# EAGLE board master_jorge3newIMU (EAGLE 7.1.0)
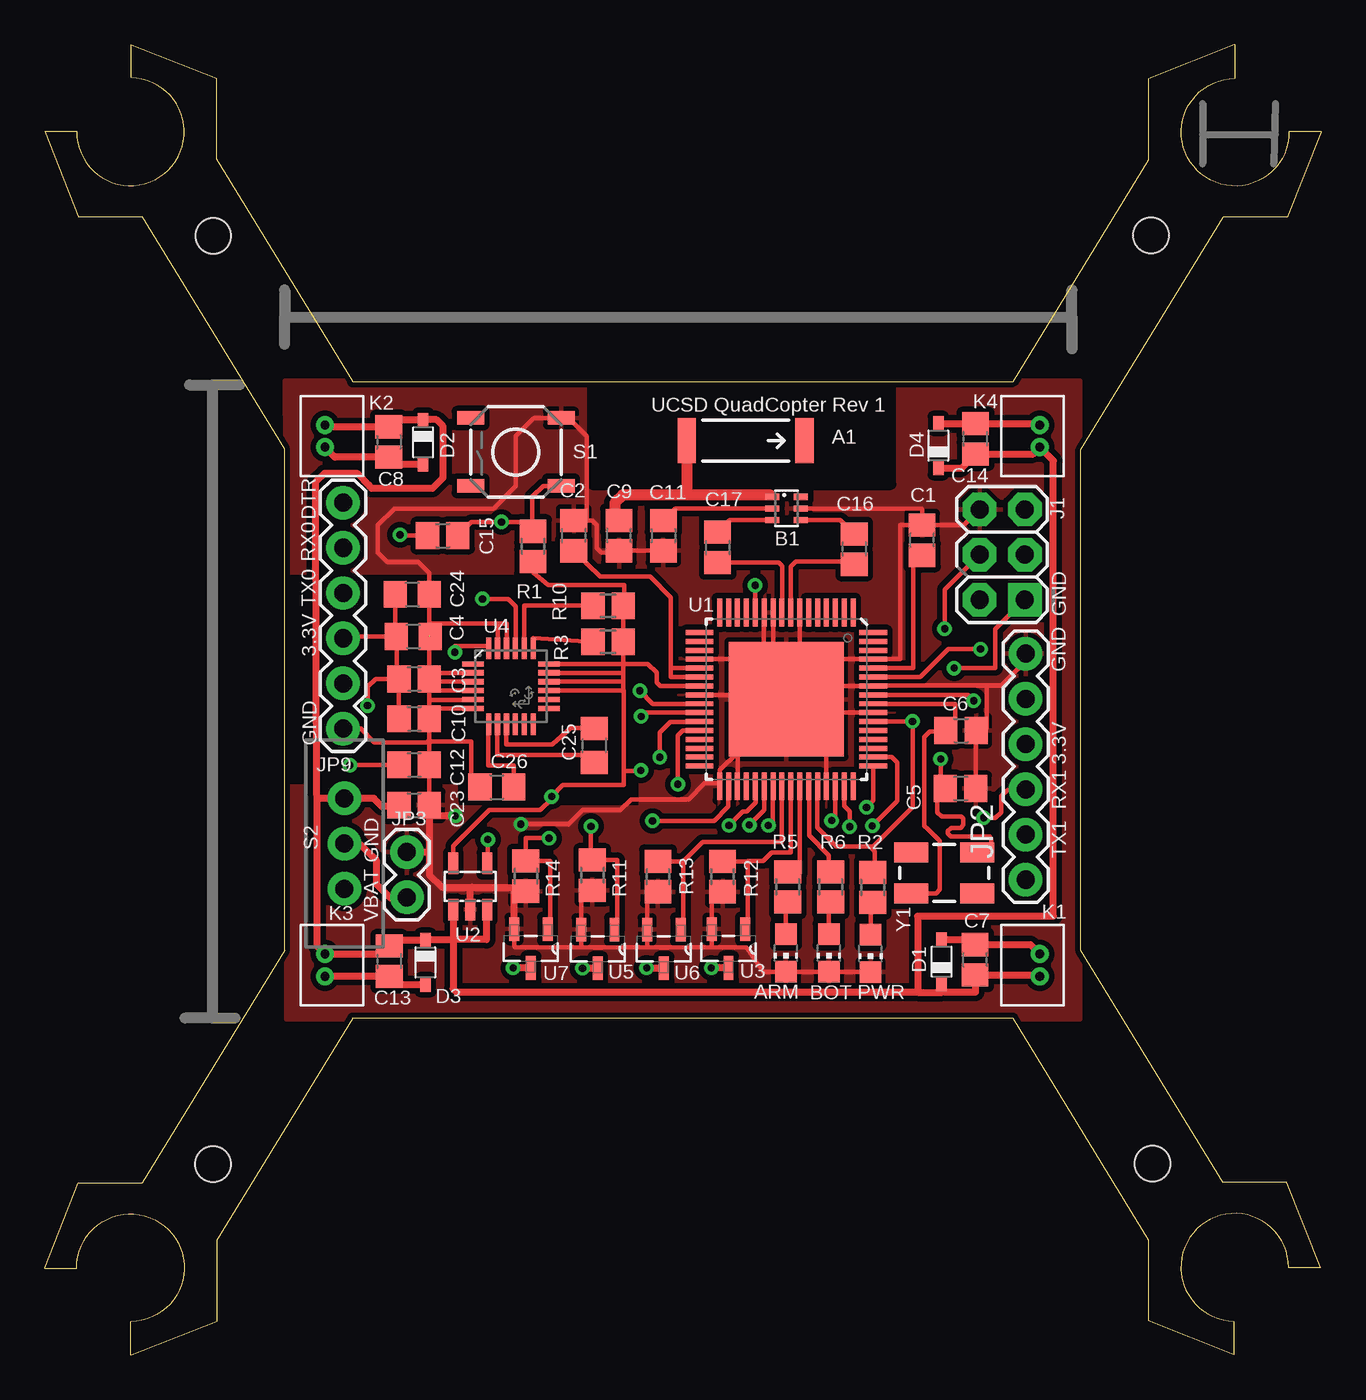
[diagram p0: board, top side]
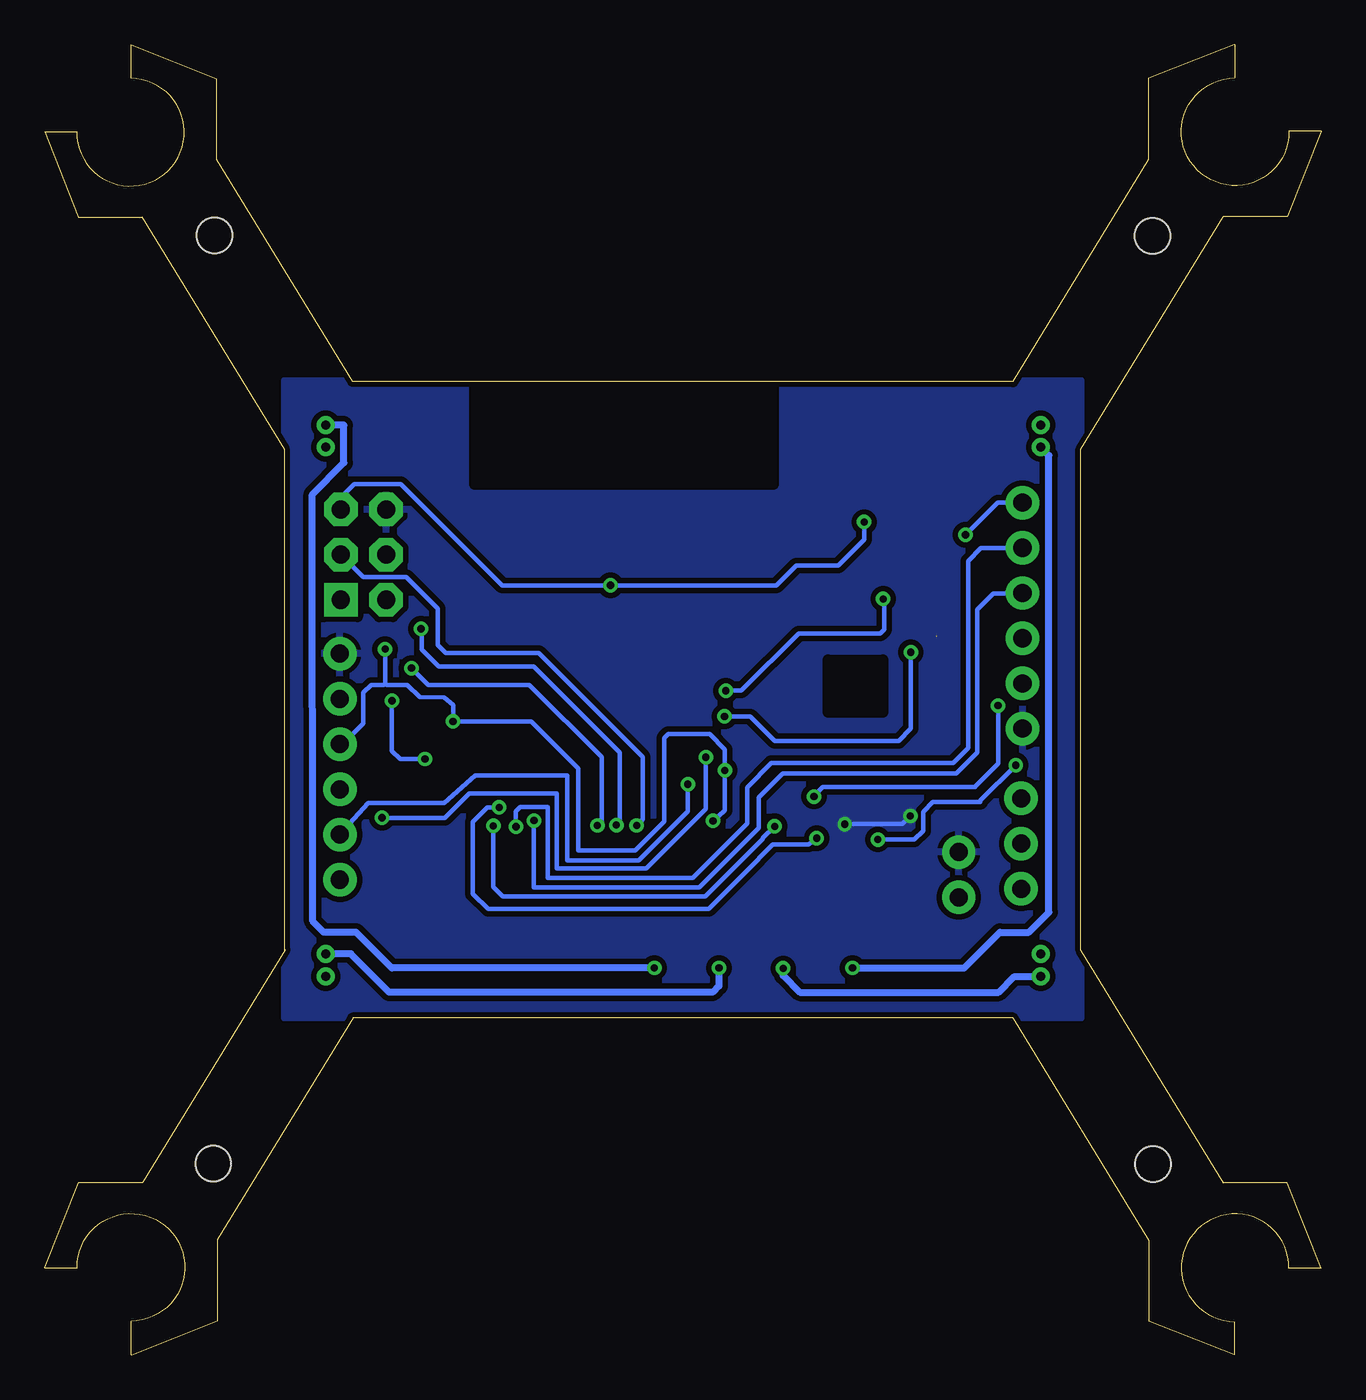
[diagram p1: board, bottom side, seen from below]

Size 71.68 x 73.61 mm. Coordinates in mm from the lower left corner, seen from the top.
Outline: 54.38,18.92 17.3,18.92 17.3,18.9 9.68,6.45 9.68,1.9 4.88,0 4.85,0 4.85,1.88 arc270 1.8,4.9 1.8,4.88 0,4.88 1.91,9.68 5.49,9.68 13.49,22.73 13.49,50.88 5.49,63.93 1.91,63.93 0,68.73 1.8,68.73 1.8,68.71 arc270 4.85,71.73 4.85,73.61 4.88,73.61 9.68,71.7 9.68,67.16 17.3,54.71 17.3,54.66
Outline: 58.19,22.73 58.19,50.85 66.19,63.91 69.77,63.91 71.68,68.71 69.88,68.71 69.88,68.68 arc-270 66.83,71.7 66.83,73.58 66.8,73.58 62,71.68 62,67.13 54.38,54.69
Outline: 17.3,54.68 54.38,54.68
Outline: 54.36,18.92 61.98,6.48 61.98,1.93 66.78,0.02 66.8,0.02 66.8,1.9 arc-270 69.85,4.93 69.85,4.9 71.65,4.9 69.75,9.7 66.17,9.7 58.17,22.76
Copper layers (1*16): Top 0.035559375mm / dielectric 1.501140625mm / Bottom 0.035559375mm
Design rules "4pcb-33board *": minimum track width 8mil, minimum drill 15mil, track to track 6mil, track to pad 6mil, pad to pad 6mil, via to via 6mil, smd to smd 6mil, copper to edge 10mil, drill to drill 10mil, minimum pad ring 10mil, minimum via ring 8mil, stop-mask expansion 4mil, vias tented up to drill 0mil, thermal gap 10mil
Net classes: 1 RFSIG: width 0.457 mm, clearance 0.205 mm to class 0, clearance 0.205 mm
Holes 2 mm at 9.45,10.72 62.2,10.74 9.47,62.86 62.13,62.89
tRestrict: area 30.8,48.9 to 35.3,54.5; area 36.9,48.9 to 41.9,54.5; area 43.2,48.9 to 47.5,54.5; area 35.3,53 to 36.9,54.5; area 41.9,53 to 43.2,54.5; area 41.9,48.9 to 43.2,49.9
bRestrict: area 35.3,48.9 to 36.9,53; area 30.8,48.9 to 35.3,54.5; area 35.3,53 to 36.9,54.5; area 36.9,48.9 to 41.9,54.5; area 41.9,53 to 43.2,54.5; area 43.2,48.9 to 47.5,54.5; area 41.9,48.9 to 43.2,49.9; area 24.6,36.1 to 27.7,39

## Footprints (pad centres in the part's own frame; a part is rotated, then mirrored left to right if it is on the bottom)
ANTENNA-CHIP5 = smd 1.016 x 2.54: FEED -3.302,0; NC 3.302,0
CHIP-LED0805 = smd 1.2 x 1.2: A 0,-1.05; C 0,1.05
BALUN = smd 0.35 x 0.8: 1 -0.65,-0.8; 2 0,-0.8; 3 0.65,-0.8; 4 0.65,0.8; 5 0,0.8; 6 -0.65,0.8
C0805 = smd 1.3 x 1.5: 1 -0.85,0; 2 0.85,0
C0805' = smd 1.3 x 1.5: 1 -0.95,0; 2 0.95,0
SOD323_ST = smd 0.8 x 0.6: A 1.25,0; C -1.25,0
2X3-NS = drill 1.016 pad 1.88 square: 1 -2.54,-1.27 | drill 1.016 pad 1.88 octagon: 2 -2.54,1.27; 3 0,-1.27; 4 0,1.27; 5 2.54,-1.27; 6 2.54,1.27
FTDI_BASIC = drill 1.016 pad 1.88: CTS 10.16,0; DTR 0,0; GND 12.7,0; RXI 2.54,0; TXO 5.08,0; VCC 7.62,0
1X02 = drill 1.016 pad 1.88: 1 0,0; 2 2.54,0
653002114822 = drill 0.5: 1 0.625,0; 2 -0.625,0
R0805 = smd 1.3 x 1.5: 1 -0.85,0; 2 0.85,0
TACTILE_SWITCH_SMD = smd 1.524 x 0.762: 1 -2.54,1.905; 2 2.54,1.905; 3 -2.54,-1.905; 4 2.54,-1.905
SWITCH-SPDT = drill 1.016 pad 1.88: 1 0,2.54; 2 0,0; 3 0,-2.54
QFN-64 = smd 1.562 x 0.28: 1 -4.881,3.75; 2 -4.881,3.25; 3 -4.881,2.75; 4 -4.881,2.25; 5 -4.881,1.75; 6 -4.881,1.25; 7 -4.881,0.75; 8 -4.881,0.25; 9 -4.881,-0.25; 10 -4.881,-0.75; 11 -4.881,-1.25; 12 -4.881,-1.75; 13 -4.881,-2.25; 14 -4.881,-2.75; 15 -4.881,-3.25; 16 -4.881,-3.75; 33 4.881,-3.75; 34 4.881,-3.25; 35 4.881,-2.75; 36 4.881,-2.25; 37 4.881,-1.75; 38 4.881,-1.25; 39 4.881,-0.75; 40 4.881,-0.25; 41 4.881,0.25; 42 4.881,0.75; 43 4.881,1.25; 44 4.881,1.75; 45 4.881,2.25; 46 4.881,2.75; 47 4.881,3.25; 48 4.881,3.75 | smd 0.28 x 1.562: 17 -3.75,-4.881; 18 -3.25,-4.881; 19 -2.75,-4.881; 20 -2.25,-4.881; 21 -1.75,-4.881; 22 -1.25,-4.881; 23 -0.75,-4.881; 24 -0.25,-4.881; 25 0.25,-4.881; 26 0.75,-4.881; 27 1.25,-4.881; 28 1.75,-4.881; 29 2.25,-4.881; 30 2.75,-4.881; 31 3.25,-4.881; 32 3.75,-4.881; 49 3.75,4.881; 50 3.25,4.881; 51 2.75,4.881; 52 2.25,4.881; 53 1.75,4.881; 54 1.25,4.881; 55 0.75,4.881; 56 0.25,4.881; 57 -0.25,4.881; 58 -0.75,4.881; 59 -1.25,4.881; 60 -1.75,4.881; 61 -2.25,4.881; 62 -2.75,4.881; 63 -3.25,4.881; 64 -3.75,4.881 | smd 6.452 x 6.452: 65 0,0
SOT23-DBV = smd 0.55 x 1.2: 1 -0.95,-1.3; 2 0,-1.3; 3 0.95,-1.3; 4 0.95,1.3; 5 -0.95,1.3
SOT95P237X112-3N = smd 1.321 x 0.559: 1 -1.092,0.94; 2 -1.092,-0.94; 3 1.092,0
LGA-24 = smd 1.208 x 0.29: 1 -2.129,1.25; 2 -2.129,0.75; 3 -2.129,0.25; 4 -2.129,-0.25; 5 -2.129,-0.75; 6 -2.129,-1.25; 13 2.129,-1.25; 14 2.129,-0.75; 15 2.129,-0.25; 16 2.129,0.25; 17 2.129,0.75; 18 2.129,1.25 | smd 0.29 x 1.208: 7 -1.25,-2.129; 8 -0.75,-2.129; 9 -0.25,-2.129; 10 0.25,-2.129; 11 0.75,-2.129; 12 1.25,-2.129; 19 1.25,2.129; 20 0.75,2.129; 21 0.25,2.129; 22 -0.25,2.129; 23 -0.75,2.129; 24 -1.25,2.129
CRYSTAL-SMD-5X3 = smd 1.9 x 1.1: 1 -1.85,-1.15; 2 1.85,-1.15; 3 1.85,1.15; 4 -1.85,1.15

## Placement (x,y rotation side)
A1  ANTENNA2SMD5  [ANTENNA-CHIP5]  39.37,51.36 0 top
ARM  GREEN  [CHIP-LED0805]  41.63,22.58 180 top
B1  748421245  [BALUN]  41.66,47.55 270 top
BOT  GREEN  [CHIP-LED0805]  44.04,22.58 180 top
C1  1uF  [C0805]  49.28,45.77 90 top
C2  1uF  [C0805]  29.72,46.02 90 top
C3  1uF  [C0805]  20.75,37.97 0 top
C4  100nF  [C0805']  20.7,40.36 0 top
C5  12pF  [C0805]  51.44,31.83 0 top
C6  12pF  [C0805]  51.46,35.08 0 top
C7  1uF  [C0805]  52.25,22.2 90 top
C8  1uF  [C0805]  19.33,51.28 270 top
C9  0.75pF  [C0805]  32.26,46.02 90 top
C10  1uF  [C0805]  20.75,35.74 0 top
C11  22pF  [C0805]  34.75,46.02 270 top
C12  10nF  [C0805]  20.75,33.15 0 top
C13  1uF  [C0805]  19.35,22.12 270 top
C14  1uF  [C0805]  52.27,51.46 90 top
C15  0.1uF  [C0805]  22.35,46.02 0 top
C16  JUMP  [C0805]  45.47,45.26 90 top
C17  JUMP  [C0805]  37.8,45.36 270 top
C23  1uF  [C0805]  20.75,30.89 0 top
C24  10uF  [C0805']  20.65,42.72 0 top
C25  0.22uF  [C0805']  30.86,34.24 270 top
C26  4.7uF  [C0805']  25.4,31.9 0 top
D1  BAS16WS  [SOD323_ST]  50.37,22.1 90 top
D2  BAS16WS  [SOD323_ST]  21.26,51.26 270 top
D3  BAS16WS  [SOD323_ST]  21.39,22.05 270 top
D4  BAS16WS  [SOD323_ST]  50.19,51.08 90 top
J1  ISP  [2X3-NS]  53.77,44.96 90 top
JP2  FTDI  [FTDI_BASIC]  55.09,26.7 90 top
JP3  Battery  [1X02]  20.35,28.24 270 top
JP9  FTDI  [FTDI_BASIC]  16.76,47.88 270 top
K1  653002114822  [653002114822]  55.88,21.89 270 top
K2  653002114822  [653002114822]  15.75,51.61 90 top
K3  653002114822  [653002114822]  15.75,21.89 90 top
K4  653002114822  [653002114822]  55.88,51.61 270 top
PWR  RED  [CHIP-LED0805]  46.38,22.56 180 top
R1  10k  [R0805]  27.43,45.42 270 top
R2  330  [R0805]  46.51,26.26 90 top
R3  10k  [R0805]  31.65,40.06 0 top
R5  330  [R0805]  41.73,26.29 90 top
R6  330  [R0805]  44.15,26.29 90 top
R10  10k  [R0805]  31.65,42.09 0 top
R11  10K  [R0805]  30.76,26.95 270 top
R12  10K  [R0805]  38.07,26.87 270 top
R13  10K  [R0805]  34.44,26.87 270 top
R14  10K  [R0805]  27.03,26.9 270 top
S1  [TACTILE_SWITCH_SMD]  26.47,50.72 180 top
S2  SW  [SWITCH-SPDT]  16.84,28.73 180 top
U1  ATMEGA128RFA1  [QFN-64]  41.66,36.83 270 top
U2  TPS73633-DBVT  [SOT23-DBV]  23.9,26.31 0 top
U3  SI2302CDS-T1-E3  [SOT95P237X112-3N]  38.4,22.83 270 top
U4  LSM9DS0  [LGA-24]  26.19,37.57 0 top
U5  SI2302CDS-T1-E3  [SOT95P237X112-3N]  31.06,22.81 270 top
U6  SI2302CDS-T1-E3  [SOT95P237X112-3N]  34.77,22.81 270 top
U7  SI2302CDS-T1-E3  [SOT95P237X112-3N]  27.3,22.83 270 top
Y1  16MHz  [CRYSTAL-SMD-5X3]  50.52,27.08 0 top

## Library data of the parts
A1 B1 = SparkFun-RF
ARM BOT PWR = led
C1-C3 C5-C17 C23 R1-R3 R5 R6 R10-R14 = resistor
C4 C24-C26 = rcl
D1-D4 J1 U1 U4 = Controller
JP2 JP9 = SparkFun-Connectors
JP3 = SparkFun
K1-K4 = Wuerth_Elektronik_eiCan_Wire_to_Board_Connectors; OC_FARNELL: unknown
S1 = SparkFun-Electromechanical
S2 = Controller; PROD_ID: SWCH-08261
U2 = Power
U3 U5-U7 = Controller; MPN: SI2302CDS-T1-E3; OC_FARNELL: 2056680; OC_NEWARK: 64T4057; PACKAGE: SOT-23-3; SUPPLIER: VISHAY SILICONIX
Y1 = SparkFun-FreqCtrl

## Nets
3.3V: C3.1 C4.1 C10.1 C24.1 JP2.VCC JP9.VCC R1.2 R2.2 R3.2 R10.2 U1.23 U1.34 U1.44 U1.54 U1.59 U2.5 U4.15 U4.16 U4.17 U4.18
AVDD: C1.1 U1.60
DTR: C15.1 JP9.DTR
DVDD: C2.1 U1.21 U1.22
GND: ARM.C B1.5 BOT.C C1.2 C2.2 C3.2 C4.2 C5.2 C6.2 C9.1 C10.2 C11.2 C12.2 C23.2 C24.2 C26.1 J1.6 JP2.GND JP3.1 JP9.GND PWR.C R11.2 R12.2 R13.2 R14.2 S1.3 U1.7 U1.10 U1.11 U1.20 U1.24 U1.33 U1.35 U1.45 U1.55 U1.58 U1.61 U1.65 U2.2 U3.2 U4.2 U4.3 U4.4 U4.5 U4.6 U4.22 U4.23 U5.2 U6.2 U7.2
MISO: J1.1 U1.39
MOSI: J1.4 U1.38
N$1: C12.1 U2.4
N$2: PWR.A R2.1
N$3: C5.1 U1.57 Y1.3
N$4: C6.1 U1.56 Y1.1
N$7: B1.2 C11.1
N$8: ARM.A R5.1
N$10: B1.4 C16.2
N$11: B1.3 C17.1
N$13: BOT.A R6.1
N$15: JP3.2 S2.2
N$20: C26.2 U4.7
N$21: C25.2 U4.8
N$22: C25.1 U4.9
N$23: R3.1 U4.19
N$24: R10.1 U4.20
N$29: C7.2 D1.A K1.2 U6.3
N$30: C8.2 D2.A K2.2 U7.3
N$31: C13.2 D3.A K3.2 U5.3
N$32: C14.2 D4.A K4.2 U3.3
PB4: R13.1 U1.40 U6.1
PB5: R12.1 U1.41 U3.1
PB6: R5.2 U1.42
PB7: R6.2 U1.43
PE3: R14.1 U1.49 U7.1
PE4: R11.1 U1.50 U5.1
RESET: C15.2 J1.5 R1.1 S1.1 U1.12
RFANT [RFSIG]: A1.FEED B1.1 C9.2
RFN: C17.2 U1.9
RFP: C16.1 U1.8
RX0: JP9.TXO U1.46
RX1: JP2.TXO U1.27
SCK: J1.3 U1.37
SCL: U1.25 U4.21
SDA: U1.26 U4.24
TX0: JP9.RXI U1.47
TX1: JP2.RXI U1.28
VBAT: C7.1 C8.1 C13.1 C14.1 C23.1 D1.C D2.C D3.C D4.C K1.1 K2.1 K3.1 K4.1 S2.3 U2.1 U2.3

## Tracks (layer width: path | path; a pad name or v marks a point on that pad's centre or on a via)
3.3V  (via drill 0.41)
  Top 0.254: U1.34 38.4,32.13 38.4,30.81 37.59,30 v34.14,30 | 43.38,32.13 U1.44 43.4,32.13 43.38,32.11 | 43.38,32.23 43.38,32.11 | 27.36,45.1 R1.2 27.43,43.94 28.27,43.26 32.54,43.26 32.54,42.13 R10.2 R3.2 32.5,38.82 | 43.38,32.11 43.38,29.64 44.45,28.57 46.33,28.57 | 32.5,38.82 32.5,38.32 | 32.5,38.32 32.5,37.82 | 32.5,37.82 32.5,37.32 | U4.18 32.5,38.82 | U4.17 32.5,38.32 | U4.16 32.5,37.82 | U4.15 32.5,37.32 | 32.5,38.82 33.88,38.82 34.37,38.33 34.37,37.77 34.57,37.57 36.76,37.57 U1.23 | C24.1 19.7,40.46 C4.1 | C4.1 19.8,37.97 C3.1 | C10.1 C3.1 | C3.1 18.59,37.97 18.16,37.54 18.16,36.5 v18.14,36.47 | 46.33,28.57 46.61,28.3 46.61,27.21 R2.2 | U2.5 22.96,27.62 22.96,28.6 24.97,30.61 27.84,30.61 28.47,31.24 v28.47,31.37 | 32.5,37.32 32.51,37.32 32.51,32.77 | 32.51,32.77 32.55,32.81 33.49,32.81 v33.49,32.84 v33.48,32.84 | 32.51,32.77 32.51,32 29.11,32 v28.47,31.37 | C4.1 16.87,40.36 JP9.VCC | U1.54 48.84,35.58 v48.74,35.58 48.74,30.78 46.53,28.57 46.33,28.57 | U1.59 49.18,38.08 50.75,39.65 v52.55,39.65 | 28.42,31.37 v28.47,31.37
  Bottom 0.254: v34.14,30 33.48,30.57 v33.48,32.84 33.48,34.02 34.34,34.87 36.65,34.87 36.88,34.65 36.88,29.97 38.51,28.35 41.71,28.35 41.71,32.94 44.35,35.58 v48.74,35.58 48.74,36.5 49.23,36.93 50.62,36.96 51.31,37.64 52.48,37.64 52.55,37.72 | v18.14,36.47 18.14,33.22 19.43,31.93 19.43,31.9 27.99,31.9 28.47,31.42 v28.47,31.37 | 52.65,39.62 v52.55,39.65 52.55,37.72 | JP2.VCC 54.81,34.59 54.66,34.59 53.77,35.48 53.77,37.21 53.34,37.64 52.63,37.64 52.55,37.72
AVDD
  Top 0.254: 49.35,44.84 C1.1 48.77,44.41 48.77,38.58 U1.60
DTR  (via drill 0.41)
  Top 0.254: C15.1 20.02,46.02 v19.96,46.08
  Bottom 0.254: JP9.DTR 18.16,47.88 v19.96,46.08
DVDD
  Top 0.254: C2.1 29.72,45.16 31.19,43.74 34.01,43.74 35.15,42.55 35.15,38.58 | U1.22 35.15,38.08 35.15,38.58 | U1.21 35.15,38.58
GND  (via drill 0.41)  (1 unrouted)
  Top 0.254: U1.10 40.91,37.38 | 40.91,37.38 U1.65 | 40.91,37.38 40.41,36.88 39.07,36.88 | U1.7 42.41,38.88 | 42.41,38.88 40.91,37.38 | U1.10 40.91,39.69 40.75,39.53 | 40.75,39.53 40.39,39.17 40.39,41.11 U1.11 | U1.10 40.91,39.16 41.4,38.66 39.12,38.66 38.86,38.91 | U1.10 40.91,40.17 | U1.10 40.91,36.64 | 38.83,38.88 38.86,38.91 | 38.91,33.86 39.12,34.09 39.12,36.83 39.07,36.88 | U1.45 43.91,36.04 | 43.91,36.04 43.91,37.17 | 43.91,37.17 43.69,37.39 40.75,37.39 40.75,39.53 | U1.35 38.91,32.13 38.91,33.86 | 29.74,46.9 C2.2 30.43,46.88 | 30.43,46.88 30.75,46.88 31.01,46.61 31.01,45.34 31.27,45.08 32.17,45.08 C9.1 C11.2 | B1.5 49.23,47.55 49.28,47.5 C1.2 | C1.2 49.29,46.61 51.61,46.61 J1.6 | 24.08,36.32 U4.6 24.31,36.32 21.6,36.32 | U4.23 25.45,39.44 25.45,41.1 | U4.22 25.96,39.44 25.96,41.1 25.45,41.1 | C5.2 52.29,34.57 | 52.29,34.57 52.29,35.05 C6.2 | 24.29,37.8 U4.3 21.6,37.82 C3.2 | 24.3,36.83 U4.5 24.31,36.8 21.6,36.8 | 21.62,42.74 21.62,43.92 20.98,44.55 19.25,44.55 18.72,45.08 18.72,46.61 19.66,47.55 25.22,47.55 26.47,48.79 26.47,51.61 27.48,52.63 S1.3 29.44,52.63 30.45,51.61 30.45,46.9 30.43,46.88 | 21.62,42.74 C24.2 | 21.62,42.74 21.62,41.1 | 21.62,41.1 21.62,40.38 | 21.6,37.87 C3.2 | U4.4 24.31,37.34 21.6,37.34 | 25.45,41.1 21.62,41.1 | 21.6,38.33 C3.2 | 21.88,30.71 C23.2 C12.2 21.6,34.54 | 21.6,36.8 21.6,36.32 | 21.6,36.32 21.6,35.61 C10.2 21.6,34.54 | 21.6,34.54 21.68,34.47 23.95,34.47 23.95,32.49 C26.1 | 21.6,34.54 21.47,34.42 18.52,34.42 17.75,35.18 JP9.GND | PWR.C 46.36,21.53 BOT.C ARM.C 41.61,21.51 40.36,21.51 39.4,22.88 37.57,22.88 | 34.7,25.49 R13.2 33.83,25.46 U6.2 33.83,22.91 33.86,22.88 | 38.33,25.46 R12.2 37.47,25.44 U3.2 37.47,22.99 37.57,22.88
  Top 0.254: U7.2 26.37,22.96 26.44,22.88 30.18,22.88 | 30.18,22.88 33.86,22.88 | 33.86,22.88 37.57,22.88 | 30.18,22.88 30.12,22.94 U5.2 30.12,25.49 R11.2 | 55.09,39.32 JP2.GND 54.71,39.01 54.71,38.58 53.72,37.59 52.88,37.59 | 38.91,33.86 37.91,32.85 U1.33 37.9,32.13 37.08,32.13 36.17,31.22 32.94,31.22 32.33,30.61 30.23,30.61 29.41,29.79 29.39,29.82 v26.75,29.82 | U1.20 38.86,39.08 38.86,38.91 | U1.24 38.86,37.08 39.07,36.88 | 42.41,38.88 42.61,39.08 U1.61 48.06,39.08 48.06,46.62 C1.2 | 43.91,37.17 44.32,37.58 U1.58 46.55,37.59 52.88,37.59 | 52.88,37.59 52.91,37.57 52.91,35.19 52.29,34.57 | U1.55 43.94,36.08 43.91,36.04 | 21.6,38.3 C3.2 | C4.2 21.6,40.36 C3.2 | 21.6,36.8 | 21.6,36.8 21.6,37.34 | 21.6,37.34 C3.2 | U4.2 21.6,38.32 C3.2
  Top 0.406: C23.2 21.62,30.87 21.62,30.38 | 24,26.26 22.33,26.26 21.62,26.97 21.62,28.27 | 24,26.26 26.34,26.26 | 26.34,26.26 26.57,26.26 26.78,26.05 R14.2 | U2.2 23.9,26.16 24,26.26 | U7.2 26.37,26.24 26.34,26.26 | 21.62,30.38 21.62,28.27 | JP3.1 21.59,28.24 21.62,28.27 | v23.06,30.28 21.72,30.28 21.62,30.38
  Bottom 0.254: v23.06,30.28 23.52,29.82 v26.75,29.82
  pour Bottom (isolate 0.305): 13.49,54.74 13.49,18.92 58.19,18.92 58.19,54.74
  pour Top (isolate 0.305): 13.56,43.94 33.43,43.94 33.48,30.76 23.14,30.76 23.09,31.93 13.56,31.93 13.56,18.85 58.17,18.85 58.17,54.74 13.49,54.74 13.49,54.53
MISO  (via drill 0.41)
  Top 0.254: U1.39 40.89,32.11 40.89,30 v40.64,29.74 | J1.1 53.62,41 53.39,40.77 53.39,38.58 v51.08,38.58
  Bottom 0.254: v40.64,29.74 40.39,30 40.39,33.58 44.45,37.64 50.14,37.64 v51.08,38.58
MOSI  (via drill 0.41)
  Top 0.254: J1.4 50.55,43 v50.55,40.79 | U1.38 40.41,30.6 v39.57,29.77
  Bottom 0.254: v39.57,29.77 39.37,29.97 39.37,33.83 44.2,38.66 49.53,38.66 50.5,39.62 50.5,40.74 v50.55,40.79
N$1  (via drill 0.41)
  Top 0.254: C12.1 17.17,33.15 v17.15,33.12 | U2.4 24.89,27.65 v24.89,28.96
  Bottom 0.254: v17.15,33.12 19.13,31.14 19.13,31.06 21.79,31.06 22.35,30.5 22.35,29.44 22.83,28.96 v24.89,28.96
N$2
  Top 0.254: PWR.A 46.38,25.29 R2.1
N$3  (via drill 0.41)
  Top 0.254: Y1.3 52.84,28.23 53.16,28.6 53.16,29.01 53.09,29.13 50.88,29.13 50.72,29.29 50.72,29.44 50.9,29.62 51.44,29.62 51.59,29.77 51.59,30.12 51.46,30.25 50.37,30.25 50.14,30.48 50.14,31.57 50.39,31.83 C5.1 50.08,32.33 50.32,32.57 v50.32,33.48 | U1.57 51.87,37.08 v52.17,36.75
  Bottom 0.254: v52.17,36.75 52.17,33.93 51.71,33.48 v50.32,33.48
N$4
  Top 0.254: Y1.1 50.06,25.93 50.27,26.14 50.27,28.88 49.61,29.54 49.58,29.54 49.4,29.72 49.4,34.72 49.71,35.03 50.56,35.03 C6.1 51.13,35.6 51.13,36.58 U1.56
N$7
  Top 0.254: B1.2 35.42,47.55 C11.1
N$8
  Top 0.254: ARM.A 41.63,25.34 R5.1
N$10
  Top 0.254: 42.48,46.88 B1.4 44.68,46.9 C16.2
N$11
  Top 0.254: B1.3 38.48,46.9 C17.1
N$13
  Top 0.254: BOT.A 44.04,25.34 R6.1
N$15
  Top 0.406: S2.2 17.68,28.73 18.39,28.02 18.42,28.02 18.62,27.81 18.62,26.47 19.41,25.68 20.32,25.68 JP3.2
N$20
  Top 0.254: U4.7 24.92,35.69 24.92,33.12 26.35,33.12 C26.2
N$21
  Top 0.254: C25.2 | U4.8 25.43,35.69 25.43,33.71 30.44,33.71 C25.2 | C25.2
N$22
  Top 0.254: U4.9 25.94,34.29 28.52,34.29 29.54,35.2 30.85,35.2 C25.1 | 30.85,35.18 C25.1 | 30.86,34.72 C25.1
N$23
  Top 0.254: R3.1 27.44,40.26 U4.19
N$24
  Top 0.254: R10.1 26.94,42.09 U4.20
N$29  (via drill 0.41 pad 0.41)
  Top 0.406: U6.3 33.83,21.72 v33.81,21.74 | D1.A 51.95,23.35 C7.2 55.35,23.05 K1.2
  Bottom 0.406: v33.81,21.74 33.81,20.73 34.16,20.37 52.32,20.37 54.48,22.53 K1.2
N$30  (via drill 0.41 pad 0.41)
  Top 0.406: U7.3 v26.31,21.74 | K2.2 16.3,50.43 C8.2 19.75,50.01 D2.A
  Bottom 0.406: v26.31,21.74 20.04,21.74 18.03,23.75 16.41,23.75 15.29,24.87 15.29,50.53 K2.2
N$31  (via drill 0.41 pad 0.41)
  Top 0.406: U5.3 v30.2,21.72 | D3.A 19.83,20.8 C13.2 K3.2
  Bottom 0.406: v30.2,21.72 30.2,21.31 29.26,20.37 18.11,20.37 17.22,21.26 15.76,21.26 K3.2
N$32  (via drill 0.41 pad 0.41)
  Top 0.406: U3.3 v37.44,21.74 | D4.A 52.25,52.33 C14.2 55.81,52.31 K4.2
  Bottom 0.406: v37.44,21.74 52.17,21.74 54.18,23.75 56.01,23.75 56.62,24.36 56.64,48.34 54.86,50.11 54.86,52.22 54.88,52.24 K4.2
PB4
  Top 0.254: U1.40 41.41,28.83 41.4,28.83 36.97,28.83 35.86,27.72 | U6.1 35.86,23.9 35.86,27.72 | 35.86,27.72 R13.1
PB5
  Top 0.254: U1.41 41.91,28.24 41.88,28.22 40.84,28.22 40.36,27.74 39.5,27.74 39.5,27.72 | U3.1 39.5,23.93 39.5,27.72 | 39.5,27.72 R12.1
PB6
  Top 0.254: U1.42 42.42,32.11 42.42,27.05 42.37,27.03 41.85,27.03 R5.2 | 41.76,27.19 R5.2 | 41.78,27.19 R5.2
PB7
  Top 0.254: U1.43 42.93,32.11 42.93,29.18 44.04,28.07 44.04,27.24 R6.2
PE3  (via drill 0.41 pad 0.41)
  Top 0.254: U7.1 28.4,23.95 28.4,27.75 R14.1 27.03,29.03 v28.32,29.03 | U1.49 46.54,31.14 v46.15,30.76
  Bottom 0.254: v46.15,30.76 46.81,30.76 47.63,29.95 47.63,25.91 46.76,25.04 34.39,25.04 31.57,27.86 31.57,27.89 30.78,28.68 28.78,28.68 v28.32,29.03
PE4  (via drill 0.41 pad 0.41)
  Top 0.254: U5.1 32.16,23.9 32.16,27.8 R11.1 | 30.76,27.28 R11.1 | v30.68,29.69 30.68,27.32 R11.1 | U1.50 47.57,33.58 47.88,33.27 47.88,31.11 v46.48,29.72
  Bottom 0.254: v46.48,29.72 46.48,26.29 45.95,25.76 34.57,25.76 31.34,28.98 31.34,29.03 v30.68,29.69
RESET  (via drill 0.41)
  Top 0.254: v39.9,43.23 39.9,41.16 U1.12 | C15.2 23.96,46.79 v25.65,46.79 27.34,46.79 R1.1 27.38,46.32 27.38,48.21 27.99,48.82 S1.1
  Bottom 0.254: v25.65,46.79 25.65,45.8 27.1,44.35 29.46,44.35 30.58,43.23 v39.9,43.23 45.97,43.23 51.66,48.92 54.28,48.92 55.04,48.16 J1.5
RFANT
  Top 0.254: 40.74,48.31 40.86,48.31 B1.1
  Top 0.61: A1.FEED 36.07,48.31 | 40.74,48.31 36.07,48.31 | 36.07,48.31 32.46,48.31 32.03,47.88 32.03,46.9 C9.2
RFN
  Top 0.254: 41.4,41.13 U1.9 41.43,41.15 41.43,44.32 41.24,44.51 C17.2
RFP
  Top 0.254: U1.8 41.91,44.29 42.19,44.58 45.3,44.58 C16.1
RX0  (via drill 0.41)
  Top 0.254: U1.46 44.41,30.23 v44.2,30.02
  Bottom 0.254: v44.2,30.02 44.2,26.26 34.93,26.26 31.57,29.62 31.57,31.32 30.23,32.66 20.47,32.66 19.3,33.83 19.3,41.88 18.42,42.77 16.79,42.77 JP9.TXO
RX1  (via drill 0.41)
  Top 0.254: v52.73,30.17 53.39,30.17 53.72,30.48 53.72,31.39 54.08,31.75 55.07,31.75 JP2.TXO | v34.54,33.58 34.54,34.98 35.13,35.56 36.76,35.56 U1.27
  Bottom 0.254: v34.54,33.58 34.54,30.68 37.9,27.33 42.93,27.33 42.93,31.55 47.83,31.55 49.2,30.17 v52.73,30.17
SCK  (via drill 0.41)
  Top 0.254: U1.37 39.93,32.15 39.93,31.04 39.42,30.53 39.22,30.53 v38.43,29.74
  Bottom 0.254: J1.3 53.77,43.69 51.36,43.69 49.61,41.94 49.61,39.88 49.15,39.42 43.94,39.42 38.1,33.58 38.1,30.07 v38.43,29.74
SCL  (via drill 0.41)
  Top 0.254: U4.21 26.47,39.44 26.47,42.04 26.04,42.47 v24.59,42.47 | U1.25 34.16,36.58 v33.43,37.31
  Bottom 0.254: v24.59,42.47 24.54,42.42 24.54,40.74 24.74,40.54 29.34,40.54 32.56,37.31 v33.43,37.31
SDA  (via drill 0.41)
  Top 0.254: U1.26 33.72,36.08 v33.5,35.86 | v23.04,39.47 23.04,39.83 24.94,39.83 U4.24
  Bottom 0.254: v23.04,39.47 23.04,35.18 23.72,34.49 30.68,34.49 32.05,35.86 v33.5,35.86
TX0  (via drill 0.41)
  Top 0.254: U1.47 44.91,30.84 45.21,30.53 v45.21,29.67
  Bottom 0.254: v45.21,29.67 45.21,30.53 44.96,30.78 43.43,30.78 43.43,26.8 35.28,26.8 32.23,29.84 32.23,31.88 30.86,33.25 20.65,33.25 19.81,34.09 19.81,44.6 19.1,45.31 16.79,45.31 JP9.RXI
TX1  (via drill 0.41)
  Top 0.254: U1.28 35.84,35.08 35.56,34.8 v35.56,32.05
  Bottom 0.254: v35.56,32.05 35.56,30.53 38.3,27.79 42.34,27.79 42.34,32.56 47.5,32.56 49.23,31.01 53.49,31.01 JP2.RXI
VBAT
  Top 0.406: 19.37,52.17 C8.1 | C8.1 15.85,52.13 K2.1 | 19.52,23.13 C13.1 | K1.1 55.88,21.35 C7.1 52.27,21.35 52.27,20.37 50.52,20.37 D1.C 50.4,20.37 49.02,20.37 | C23.1 19.72,30.81 18.95,30.81 18.49,31.27 S2.3 15.34,31.27 15.29,31.32 | 15.29,31.32 15.29,31.42 15.24,47.57 15.24,49.05 15.72,49.53 17.55,49.53 18.21,48.87 18.21,48.84 18.36,48.69 21.79,48.69 22.38,49.28 22.38,52.17 22.02,52.53 21.28,52.53 D2.C 19.7,52.51 C8.1 | 15.29,31.32 15.29,22.98 K3.1 18.9,22.52 C13.1 | D4.C 51.49,49.83 C14.1 55.5,50.61 K4.1 56.64,50.23 56.64,24.64 49.02,24.64 49.02,20.37 | 19.36,52.1 C8.1 | D3.C 19.35,23.3 C13.1 | 21.39,23.13 D3.C | U2.1 22.96,25.01 22.96,23.34 | 22.96,23.34 22.96,23.32 22.94,23.32 | 22.94,23.32 21.39,23.32 D3.C | U2.3 24.82,25.01 24.82,23.34 22.96,23.34 | 22.94,23.32 22.94,20.57 23.14,20.37 49.02,20.37

## Text on the board
tPlace: UCSD QuadCopter Rev 1 | DTR | RX0 | TX0 | GND | 3.3V | GND | GND | 3.3V | RX1 | GND | TX1 | VBAT
tDocu: 0.238 inch / 6.045 mm | 2.90 inch / 73.66 mm | 1.4 inch / 35.56 mm | 1.41 inch / 35.81 mm | >Info / Board Name: UCSD QuadCopter / Part Number: 0 / Number of Layers: 2 / Dimension X= 2.83 inch / Dimension Y= 2.90 inch / Board Material Type: FR-4 / Solder Mask Color: Green / Silkscreen Color: White / Finish Plating: HASAL / Revision Number: 1 | 2.83 inch / 71.88 mm